# Allegro board basemon_mod.brd

No outline. copper layers: TOP, VTT, GND, VCC, BOTTOM. Coordinates in mm from the lowest, leftmost part position.

## Placement (name value [footprint] x y rotation side)
U1  -  [CONN10]  0 12.7 0 top
U2  ***  [SOIC14]  0 0 0 top

## Library data of the parts
U1 = IDS_C10: User Part Number: ***
U2 = OPA4277

## Footprints (pads in the part's own frame, mm; a bottom-side part is the same pattern mirrored in y, then rotated)
CONN10
  round 1.524 hole 0.914: 1(0,0) 2(0,2.54) 3(2.54,0) 4(2.54,2.54) 5(5.08,0) 6(5.08,2.54) 7(7.62,0) 8(7.62,2.54) 9(10.16,0) 10(10.16,2.54)
SOIC14
  rect 1.27x0.635 smd: 1(-2.477,3.81) 2(-2.477,2.54) 3(-2.477,1.27) 4(-2.477,0) 5(-2.477,-1.27) 6(-2.477,-2.54) 7(-2.477,-3.81) 8(2.477,-3.81) 9(2.477,-2.54) 10(2.477,-1.27) 11(2.477,0) 12(2.477,1.27) 13(2.477,2.54) 14(2.477,3.81)

## Nets
UNNAMED_1_CSMD0805_I6_A: U2.4(V+)
UNNAMED_1_CSMD0805_I7_A: U2.11(V-)
UNNAMED_1_IDSC10_I1_PIN1: U1.1(PIN1) U2.3(+IN_A)
UNNAMED_1_IDSC10_I1_PIN2: U1.2(PIN2) U2.5(+IN_B)
UNNAMED_1_IDSC10_I1_PIN3: U1.3(PIN3) U2.10(+IN_C)
UNNAMED_1_IDSC10_I1_PIN4: U1.4(PIN4) U2.12(+IN_D)
UNNAMED_1_IDSC10_I1_PIN5: U1.5(PIN5)
UNNAMED_1_IDSC10_I1_PIN6: U1.6(PIN6)
UNNAMED_1_IDSC10_I1_PIN7: U1.7(PIN7)
UNNAMED_1_IDSC10_I1_PIN8: U1.8(PIN8)
UNNAMED_1_IDSC10_I1_PIN9: U1.9(PIN9)
UNNAMED_1_IDSC10_I1_PIN10: U1.10(PIN10)
UNNAMED_1_IDSC10_I2_PIN1: U2.1(OUT_A) U2.2(-IN_A)
UNNAMED_1_IDSC10_I2_PIN2: U2.6(-IN_B) U2.7(OUT_B)
UNNAMED_1_IDSC10_I2_PIN3: U2.8(OUT_C) U2.9(-IN_C)
UNNAMED_1_IDSC10_I2_PIN4: U2.13(-IN_D) U2.14(OUT_D)
